# Altium PCB STM32F303VCT6_PLC.PcbDoc (part 3 of 3)
Units mm, origin at the board's own origin, x right, y up, seen from the top; angles counter-clockwise.
Board outline 150 x 150 mm, 4 copper layers ([L1] TOP, [L2] GND, [L3] POWER, [L4] BOTTOM), stack 1.58 mm thick; 269 components, 235 nets, 934 pads, 331 vias.
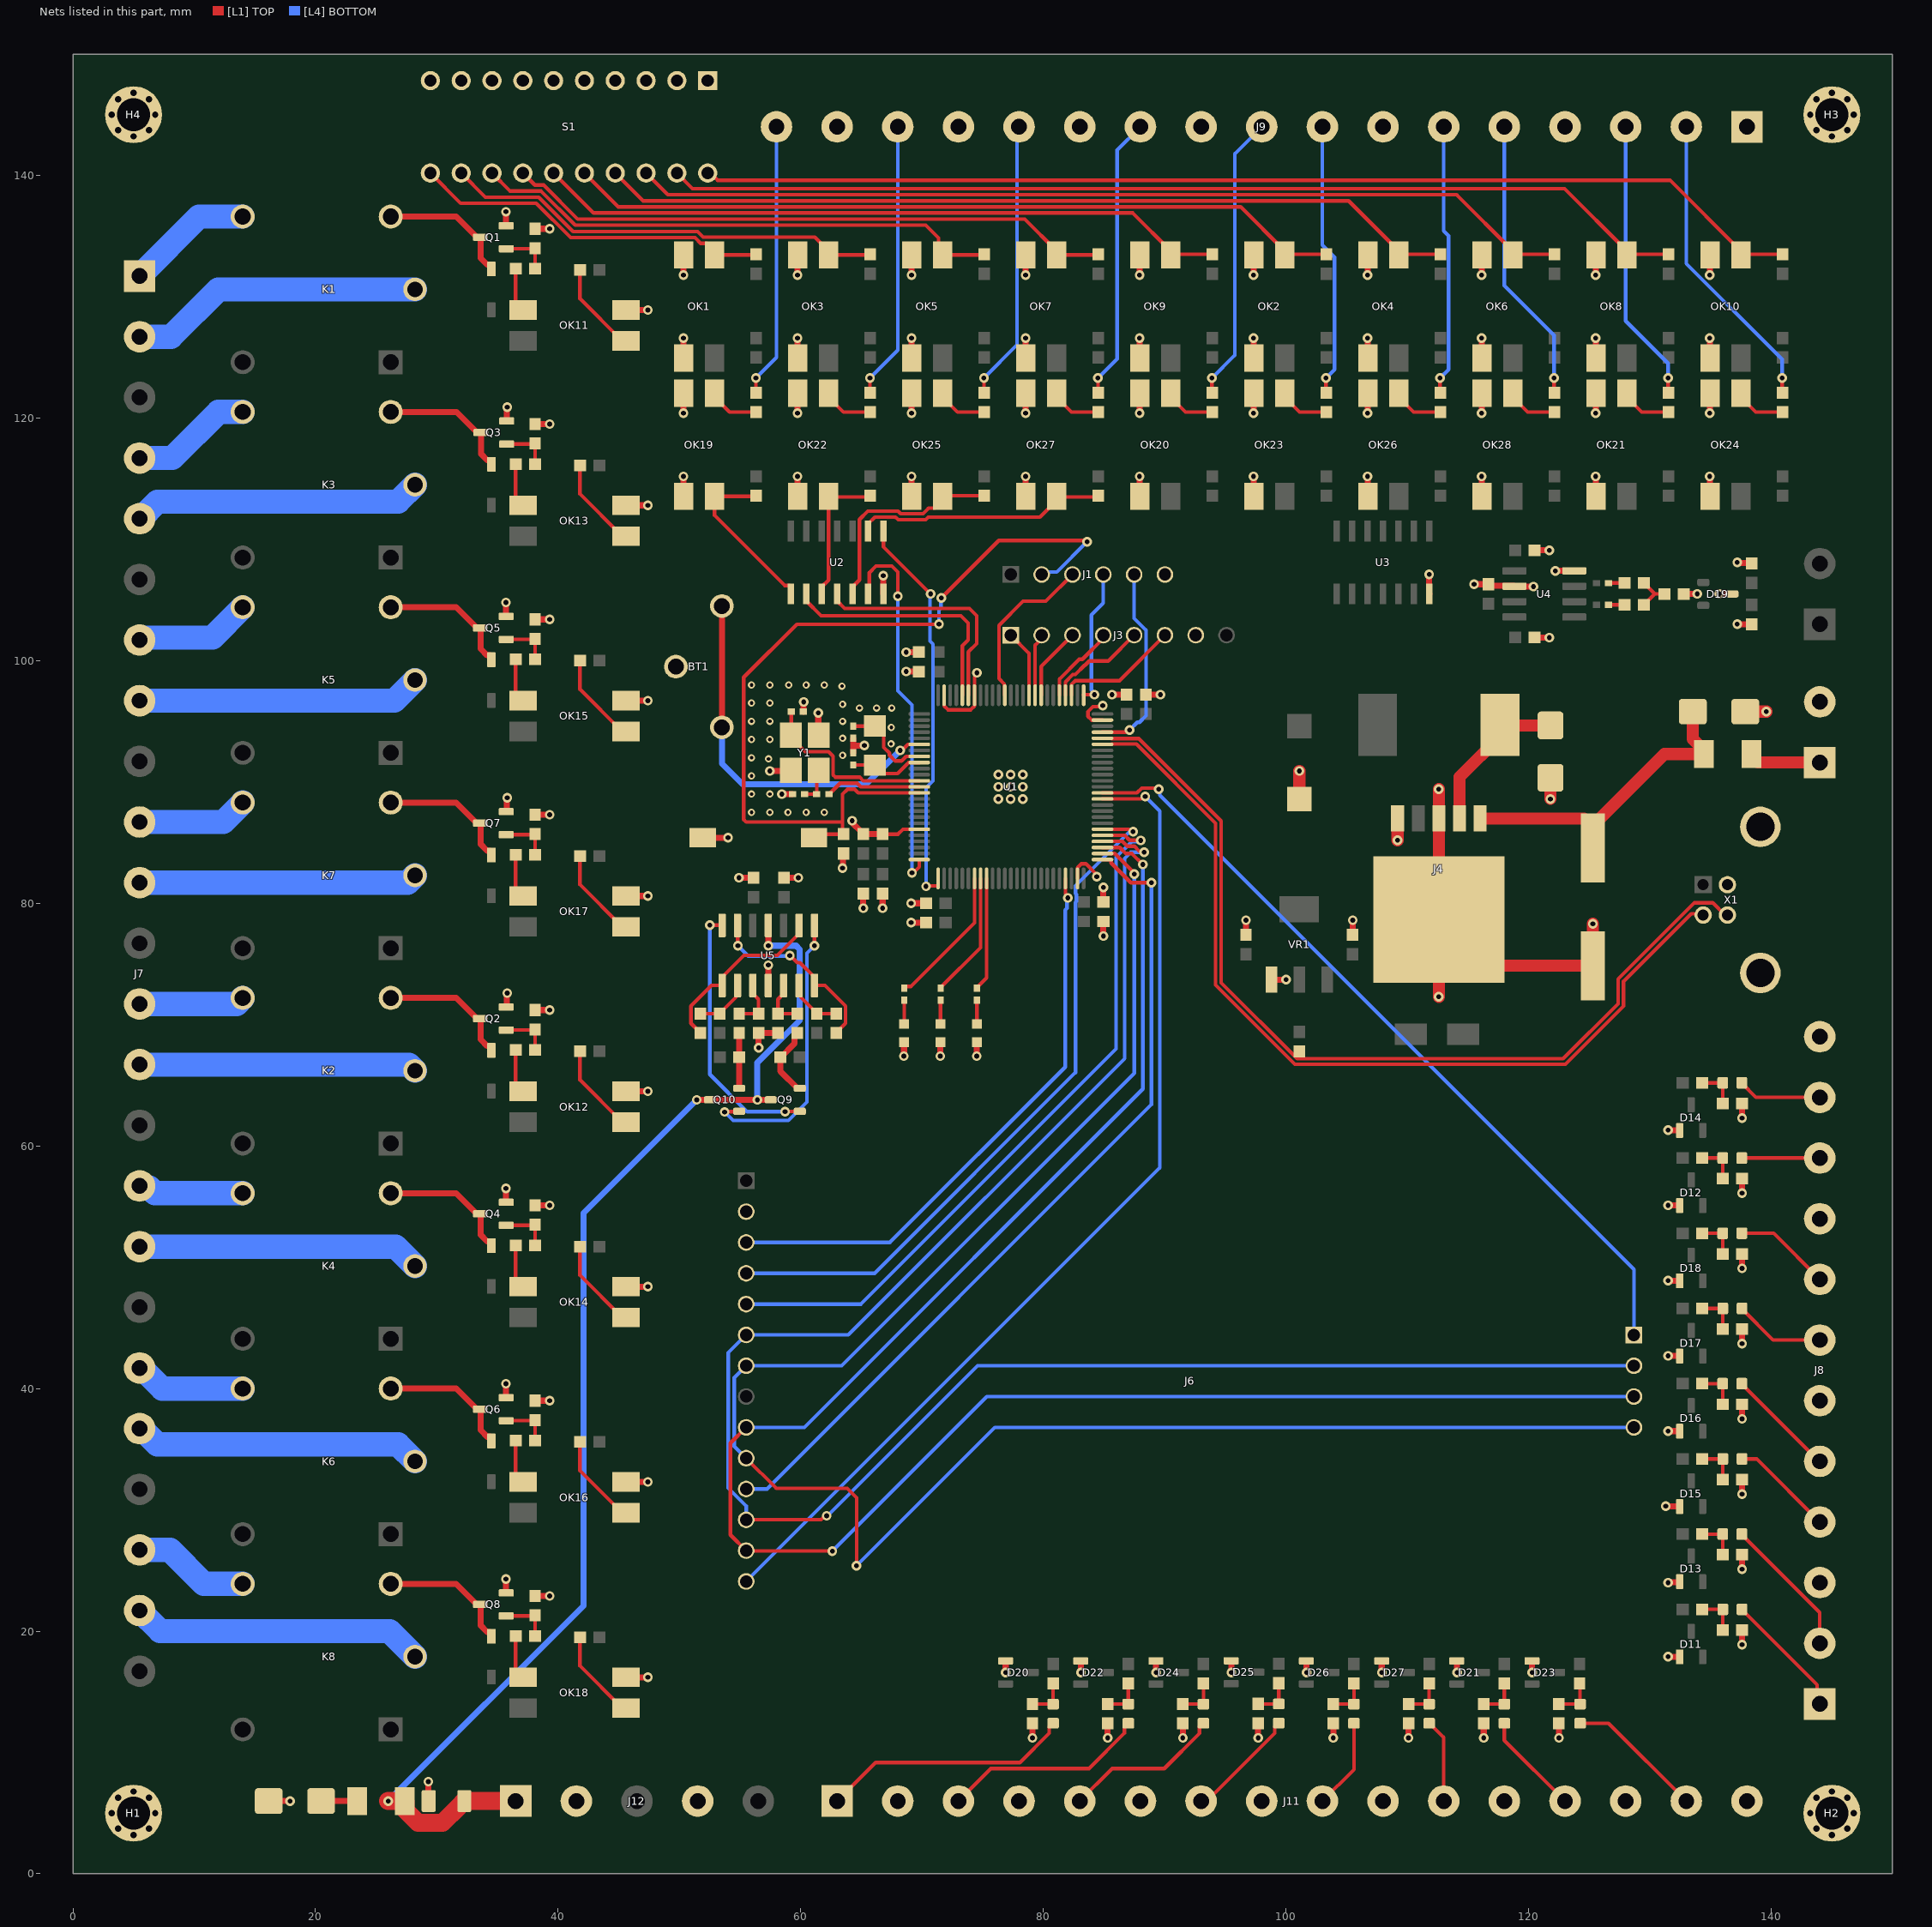
[diagram p5: the nets of this part, all layers, seen from the top]

## Via types
v1: diameter 0.8, hole 0.4, [L1] TOP to [L4] BOTTOM, 300 vias
v2: diameter 0.6, hole 0.3, [L1] TOP to [L4] BOTTOM, 31 vias

## Nets (pads, with @x,y where several pads share a name; then routed paths per layer and width w, separated by ;. In a path a pad name is that pad's centre, name@x,y a point inside that pad or via, vN(x,y) a via of type N, cw(c..) or ccw(c..) an arc to the next point about the centre after c; other vN are vias at no path point) (continued)
GND: BT1.N C1.2 C2.2 C3.2 C4.2 C5.2 C6.2 C7.2 C8.2 C9.2 C10.2 C11.2 C12.2 C13.2 C14.2 C15.2 C16.2 C17.2 C18.2 C19.2 C20.2 C21.2 C22.1 C23.1 C24.1 C25.1 C26.2 C27.2 C28.2 C29.2 C30.2 D1.A D2.A D11.1 D12.1 D13.1 D14.1 D15.1 D16.1 D17.1 D18.1 D19.3 D20.1 D21.1 D22.1 D23.1 D24.1 D25.1 D26.1 D27.1 D28.A DS1.2 DS2.2 DS3.2 H1.1 H2.1 H3.1 H4.1 J1.06 J3.07 J4.3 J4.5 J4.6 J5.2 J6.02 J8.3 J8.6 J8.9 J8.12 J9.1 J9.4 J9.7 J9.10 J9.12 J9.14 J9.16 J11.2 J11.4 J11.6 J11.8 J11.10 J11.12 J11.14 J11.16 J12.2 J12.4 OK1.2 OK1.3 OK2.2 OK2.3 OK3.2 OK3.3 OK4.2 OK4.3 OK5.2 OK5.3 OK6.2 OK6.3 OK7.2 OK7.3 OK8.2 OK8.3 OK9.2 OK9.3 OK10.2 OK10.3 OK11.2 OK12.2 OK13.2 OK14.2 OK15.2 OK16.2 OK17.2 OK18.2 OK19.2 OK19.3 OK20.2 OK20.3 OK21.2 OK21.3 OK22.2 OK22.3 OK23.2 OK23.3 OK24.2 OK24.3 OK25.2 OK25.3 OK26.2 OK26.3 OK27.2 OK27.3 OK28.2 OK28.3 Q1.2 Q2.2 Q3.2 Q4.2 Q5.2 Q6.2 Q7.2 Q8.2 R27.2 R28.2 R33.2 R34.2 R39.2 R40.2 R45.2 R46.2 R49.1 R50.1 R53.1 R54.1 R56.1 R58.1 R60.1 R62.1 R89.1 R90.1 R93.1 R94.1 R96.1 R98.1 R100.1 R102.1 R105.1 R110.1 S1.1A S1.2A S1.3A S1.4A S1.5A S1.6A S1.7A S1.8A S1.9A S1.10A SW1.1 U1.20 U1.49 U1.74 U1.94 U1.99 U2.7 U3.7 U4.2 U4.8 U5.11 VR1.1 X1.4 X1.P1 X1.P2 Y1.2 Y1.4 | length 252.5
  [L1] TOP w0.3: C15.2@66.746,85.7 68.023,85.7 68.423,86.1 U1.20@69.77,86.1 ; U1.99@71.82,97.15 71.82,96.264 72.134,95.95 74.006,95.95 74.32,96.264 74.32,98.665 74.52,98.865 v1(74.52,99) ; U1.49@82.82,82.05 82.82,82.936 83.134,83.25 83.506,83.25 84.304,82.452 84.304,82.296 v1(84.4,82.2) ; U1.74@84.87,95.1 83.984,95.1 83.67,95.414 83.67,95.786 84.088,96.204 84.804,96.204 v1(84.9,96.3)
  [L1] TOP w0.5: D28.A@16.14,6 v1(17.9,6) ; v1(29.3,7.6) 29.313,7.587 29.313,6.013 C28.2@29.325,6 ; v1(35.7,24.3) 35.71,24.29 35.71,23.16 Q8.2@35.72,23.15 ; v1(35.7,40.4) 35.71,40.39 35.71,39.26 Q6.2@35.72,39.25 ; v1(35.7,56.5) 35.71,56.49 35.71,55.36 Q4.2@35.72,55.35 ; v1(35.7,104.8) 35.71,104.79 35.71,103.66 Q5.2@35.72,103.65 ; v1(35.7,137) 35.71,136.99 35.71,135.86 Q1.2@35.72,135.85 ; Q2.2@35.72,71.45 35.76,71.49 35.76,72.56 v1(35.8,72.6) ; Q7.2@35.72,87.55 35.76,87.59 35.76,88.66 v1(35.8,88.7) ; Q3.2@35.76,119.75 35.78,119.77 35.78,120.88 v1(35.8,120.9) ; R46.2@38.1,22.9 v1(39.3,22.9) ; R40.2@38.1,39 v1(39.3,39) ; R34.2@38.1,55.1 v1(39.3,55.1) ; R28.2@38.1,71.2 v1(39.3,71.2) ; R45.2@38.1,87.3 v1(39.3,87.3) ; R39.2@38.1,103.4 v1(39.3,103.4) ; R33.2@38.1,119.5 v1(39.3,119.5) ; R27.2@38.1,135.6 v1(39.3,135.6) ; OK18.2@45.6,16.2 v1(47.4,16.2) ; OK16.2@45.6,32.3 v1(47.4,32.3) ; OK14.2@45.6,48.4 v1(47.4,48.4) ; OK12.2@45.6,64.5 v1(47.4,64.5) ; OK17.2@45.6,80.6 v1(47.4,80.6) ; OK15.2@45.6,96.7 v1(47.4,96.7) ; OK13.2@45.6,112.8 v1(47.4,112.8) ; OK11.2@45.6,128.9 v1(47.4,128.9) ; v1(50.33,115.19) 50.33,113.57 OK19.3@50.36,113.54 ; v1(50.33,120.39) 50.33,122.01 OK19.2@50.36,122.04 ; v1(50.33,126.59) 50.33,124.97 OK1.3@50.36,124.94 ; v1(50.33,131.79) 50.33,133.41 OK1.2@50.36,133.44 ; SW1.1@51.91,85.4 v1(54,85.4) ; v1(54.9,82.1) C29.2@56.124,82.1 ; v1(56.524,68.1) R110.1@56.524,69.3 R105.1@58.124,69.3 ; U5.11@57.324,73.225 v1(57.324,74.9) ; v1(57.446,90.9) 59.12,90.9 Y1.2@59.17,90.95 ; v1(58.446,89) C18.2@59.32,89 ; C30.2@58.624,82.1 v1(59.8,82.1) ; v1(59.73,115.19) 59.73,113.57 OK22.3@59.76,113.54 ; v1(59.73,120.39) 59.73,122.01 OK22.2@59.76,122.04 ; v1(59.73,126.59) 59.73,124.97 OK3.3@59.76,124.94 ; v1(59.73,131.79) 59.73,133.41 OK3.2@59.76,133.44 ; C11.2@60.22,95.8 60.233,95.8 60.233,96.587 v1(60.246,96.6) ; v1(61.446,95.7) 61.446,93.874 Y1.4@61.47,93.85 ; v1@63.483,82.937 63.483,84.063 C17.2@63.52,84.1 ; v1(64.238,86.808) 64.295,86.75 64.295,86.576 64.921,85.95 64.921,85.925 C16.2@65.146,85.7 C15.2@66.746,85.7 ; C19.2@64.32,92.4 64.32,93 ; C12.2@64.32,93.6 64.32,93 ; v1(65.146,79.6) C14.2@65.146,80.8 ; v1(65.246,93) 65.107,93 64.32,93 ; v1(66.746,79.6) C13.2@66.746,80.8 ; v1(66.8,107) 66.805,106.995 66.805,106.1 66.81,106.095 U2.7@66.81,105.499 ; v1(68.5,67.4) 68.512,67.412 68.512,68.538 DS1.2@68.524,68.55 ; v1(68.7,99.1) C7.2@69.746,99.1 ; v1(68.7,100.7) C8.2@69.746,100.7 ; v1(69.1,78.4) C4.2@70.346,78.4 ; v1(69.1,80) C3.2@70.346,80 ; v1(69.13,115.19) 69.13,113.57 OK25.3@69.16,113.54 ; v1(69.13,120.39) 69.13,122.01 OK25.2@69.16,122.04 ; v1(69.13,126.59) 69.13,124.97 OK5.3@69.16,124.94 ; v1(69.13,131.79) 69.13,133.41 OK5.2@69.16,133.44 ; v1(71.5,67.4) 71.512,67.412 71.512,68.538 DS2.2@71.524,68.55 ; v1(74.5,67.4) 74.512,67.412 74.512,68.538 DS3.2@74.524,68.55 ; D20.1@76.88,17.55 76.89,17.54 76.89,16.61 v1(76.9,16.6) ; v1(78.53,115.19) 78.53,113.57 OK27.3@78.56,113.54 ; v1(78.53,120.39) 78.53,122.01 OK27.2@78.56,122.04 ; v1(78.53,126.59) 78.53,124.97 OK7.3@78.56,124.94 ; v1(78.53,131.79) 78.53,133.41 OK7.2@78.56,133.44 ; v1(79.1,11.2) R89.1@79.1,12.4 ; D22.1@83.08,17.55 83.09,17.54 83.09,16.61 v1(83.1,16.6) ; v1(84.946,77.3) C6.2@84.946,78.5 ; C5.2@84.946,80.1 v1(84.946,81.3) ; v1(85.3,11.2) R93.1@85.3,12.4 ; v1(85.646,97.2) C1.2@86.846,97.2 ; v1(87.93,115.19) 87.93,113.57 OK20.3@87.96,113.54 ; v1(87.93,120.39) 87.93,122.01 OK20.2@87.96,122.04 ; v1(87.93,126.59) 87.93,124.97 OK9.3@87.96,124.94 ; v1(87.93,131.79) 87.93,133.41 OK9.2@87.96,133.44 ; C2.2@88.446,97.2 v1(89.646,97.2) ; D24.1@89.28,17.55 89.29,17.54 89.29,16.61 v1(89.3,16.6) ; v1(91.5,11.2) R96.1@91.5,12.4 ; D25.1@95.481,17.563 95.49,17.553 95.49,16.61 v1(95.5,16.6) ; C10.2@96.7,77.4 v1(96.7,78.6) ; v1(97.33,115.19) 97.33,113.57 OK23.3@97.36,113.54 ; v1(97.33,120.39) 97.33,122.01 OK23.2@97.36,122.04 ; v1(97.33,126.59) 97.33,124.97 OK2.3@97.36,124.94 ; v1(97.33,131.79) 97.33,133.41 OK2.2@97.36,133.44 ; v1(97.7,11.2) R98.1@97.701,12.413 ; VR1.1@98.8,73.7 v1(100,73.7) ; D26.1@101.68,17.55 101.69,17.54 101.69,16.61 v1(101.7,16.6) ; v1(103.9,11.2) R100.1@103.9,12.4 ; C9.2@105.5,77.4 v1(105.5,78.6) ; v1(106.73,115.19) 106.73,113.57 OK26.3@106.76,113.54 ; v1(106.73,120.39) 106.73,122.01 OK26.2@106.76,122.04 ; v1(106.73,126.59) 106.73,124.97 OK4.3@106.76,124.94 ; v1(106.73,131.79) 106.73,133.41 OK4.2@106.76,133.44 ; D27.1@107.88,17.55 107.89,17.54 107.89,16.61 v1(107.9,16.6) ; v1(110.1,11.2) R102.1@110.1,12.4 ; v1(111.8,107.1) 111.805,107.095 111.805,105.504 U3.7@111.81,105.499 ; D21.1@114.08,17.55 114.09,17.54 114.09,16.61 v1(114.1,16.6) ; v1(115.5,106.3) C23.1@116.7,106.3 116.815,106.185 118.78,106.185 118.848,106.118 120.383,106.118 v1(120.4,106.1) ; v1(116.13,115.19) 116.13,113.57 OK28.3@116.16,113.54 ; v1(116.13,120.39) 116.13,122.01 OK28.2@116.16,122.04 ; v1(116.13,126.59) 116.13,124.97 OK6.3@116.16,124.94 ; v1(116.13,131.79) 116.13,133.41 OK6.2@116.16,133.44 ; v1(116.3,11.2) R90.1@116.3,12.4 ; D23.1@120.28,17.55 120.29,17.54 120.29,16.61 v1(120.3,16.6) ; C26.2@120.5,101.9 v1(121.7,101.9) ; C24.1@120.5,109.1 v1(121.7,109.1) ; v1(122.2,107.4) 122.203,107.403 123.767,107.403 U4.8@123.77,107.405 ; v1(122.5,11.2) R94.1@122.5,12.4 ; v1(125.53,115.19) 125.53,113.57 OK21.3@125.56,113.54 ; v1(125.53,120.39) 125.53,122.01 OK21.2@125.56,122.04 ; v1(125.53,126.59) 125.53,124.97 OK8.3@125.56,124.94 ; v1(125.53,131.79) 125.53,133.41 OK8.2@125.56,133.44 ; v1(131.3,30.3) 131.31,30.29 132.44,30.29 D15.1@132.45,30.28 ; v1(131.5,17.9) 131.51,17.89 132.44,17.89 D11.1@132.45,17.88 ; v1(131.5,24) 131.54,24.04 132.41,24.04 D13.1@132.45,24.08 ; v1(131.5,36.5) 131.51,36.49 132.44,36.49 D16.1@132.45,36.48 ; v1(131.5,42.7) 131.51,42.69 132.44,42.69 D17.1@132.45,42.68 ; v1(131.5,48.9) 131.51,48.89 132.44,48.89 D18.1@132.45,48.88 ; v1(131.5,55.1) 131.51,55.09 132.44,55.09 D12.1@132.45,55.08 ; v1(131.5,61.3) 131.51,61.29 132.44,61.29 D14.1@132.45,61.28 ; C25.1@132.8,105.5 v1(133.9,105.5) ; v1(134.93,115.19) 134.93,113.57 OK24.3@134.96,113.54 ; v1(134.93,120.39) 134.93,122.01 OK24.2@134.96,122.04 ; v1(134.93,126.59) 134.93,124.97 OK10.3@134.96,124.94 ; v1(134.93,131.79) 134.93,133.41 OK10.2@134.96,133.44 ; v1(135.7,105.5) D19.3@136.8,105.5 ; v1(137.2,103) C27.2@138.4,103 ; v1(137.2,108.1) 137.25,108.05 138.35,108.05 C22.1@138.4,108 ; v1(137.6,18.9) R49.1@137.6,20.1 ; v1(137.6,25.1) R53.1@137.6,26.3 ; v1(137.6,31.3) R56.1@137.6,32.5 ; v1(137.6,37.5) R58.1@137.6,38.7 ; v1(137.6,43.7) R60.1@137.6,44.9 ; v1(137.6,49.9) R62.1@137.6,51.1 ; v1(137.6,56.1) R50.1@137.6,57.3 ; v1(137.6,62.3) R54.1@137.6,63.5
  [L1] TOP w1: C21.2@101.1,88.6 v1(101.1,90.9) ; J4.5@109.197,86.991 J4.5@109.197,86.991 109.199,85.202 v1(109.2,85.2) ; v1(112.6,72.3) J4.6@112.6,78.66 ; J4.3@112.601,86.991 112.601,78.66 116.411,74.85 C20.2@125.3,74.85 v1(125.3,78.3) ; J4.3@112.6,86.992 v1@112.6,89.4 ; v1(121.8,88.6) D2.A@121.8,90.34 ; D1.A@137.86,95.8 v1(139.6,95.8)
  other v1: 63.446,82.9 76.3,88.6 77.3,88.6 78.3,88.6 112.6,89.4 76.3,89.6 77.3,89.6 78.3,89.6 76.3,90.6 77.3,90.6 78.3,90.6
  other v2: 55.946,87.5 57.446,87.5 58.946,87.5 60.446,87.5 61.946,87.5 55.946,89 57.446,89 55.946,90.5 57.349,91.903 55.946,92 63.446,92.2 67.443,93.14 55.946,93.5 57.447,93.501 63.446,93.6 67.47,94.488 55.946,95 57.446,95 63.446,95 64.846,96.1 66.246,96.1 67.506,96.1 63.446,96.4 55.946,96.5 57.446,96.5 63.399,97.9 55.946,98 57.446,98 59,98 60.446,98 61.946,98
IC0: U1.96 U2.2 | length 20.8
  [L1] TOP w0.3: U2.2@60.46,105.499 60.46,104.915 61.675,103.7 73.2,103.7 73.8,103.1 73.8,101.7 73.32,101.22 U1.96@73.32,97.15
IC1: U1.95 U2.4 | length 19.4
  [L1] TOP w0.3: U2.4@63,105.499 63,104.915 63.615,104.3 73.9,104.3 74.5,103.7 74.5,101.4 73.82,100.72 U1.95@73.82,97.15
IC2: U1.25 U2.6 | length 31.2
  [L1] TOP w0.3: U2.6@65.54,105.499 65.657,105.616 65.657,107.257 66.2,107.8 67.5,107.8 68,107.3 v1(68,105.3) ; v1(69.17,82.522) 69.292,82.522 69.77,83 U1.25@69.77,83.6
  [L4] BOTTOM w0.3: v1(68,105.3) 68,99.9 68,97.51 69.17,96.34 v1(69.17,82.522)
IC3: U1.26 U2.8 | length 32.9
  [L1] TOP w0.3: U2.8@66.81,110.681 66.81,109.39 v1(70.7,105.5) ; v1(70.329,81.4) 70.354,81.425 71.32,81.425 U1.26@71.32,82.05
  [L4] BOTTOM w0.3: v1(70.329,81.4) 70.329,89.527 70.9,90.098 70.9,101.356 70.646,101.61 70.646,105.446 v1(70.7,105.5)
IC_0: OK19.4 R63.1 U2.1 | length 14.4
  [L1] TOP w0.3: OK19.4@52.93,113.57 OK19.4@52.9,113.54 ; R63.1@56.33,113.59 56.28,113.54 OK19.4@52.9,113.54 ; U2.1@59.19,105.499 59.19,106.083 59.073,106.2 58.665,106.2 52.9,111.965 OK19.4@52.9,113.54
IC_1: OK22.4 R69.1 U2.3 | length 11.7
  [L1] TOP w0.3: U2.3@61.73,105.499 61.73,106.083 62.3,106.653 OK22.4@62.3,113.54 62.35,113.49 65.63,113.49 R69.1@65.68,113.54
IC_2: OK25.4 R75.1 U2.5 | length 17.8
  [L1] TOP w0.3: U2.5@64.27,105.499 64.27,106.083 64.837,106.65 64.837,111.637 65.532,112.332 68.019,112.332 68.236,112.115 70.084,112.115 70.534,112.565 71.05,112.565 71.7,113.215 OK25.4@71.7,113.54 71.73,113.57 71.75,113.59 R75.1@75.13,113.59
IC_3: OK27.4 R79.1 U2.9 | length 20.9
  [L1] TOP w0.3: U2.9@65.54,110.681 65.54,111.265 66.107,111.832 67.812,111.832 68.029,111.615 70.291,111.615 70.508,111.832 79.717,111.832 81.1,113.215 OK27.4@81.1,113.54 81.15,113.49 84.43,113.49 R79.1@84.48,113.54
LCD_CS: J6.03 U1.47 | length 48
  [L1] TOP w0.3: U1.47@81.82,82.05 81.82,80.778 82.02,80.578 v1(82.02,80.443)
  [L4] BOTTOM w0.3: J6.03@55.5,52.04 67.34,52.04 81.8,66.5 81.8,79.3 81.8,79.443 81.95,79.593 81.95,80.373 v1(82.02,80.443)
LCD_D/C: J6.05 U1.55 | length 60.9
  [L1] TOP w0.3: U1.55@84.87,85.6 86.71,85.6 87.11,85.2 87.99,85.2 v1(88.014,85.175)
  [L4] BOTTOM w0.3: J6.05@55.5,46.96 64.96,46.96 86,68 86,79.3 86,83.8 87.28,85.08 87.919,85.08 v1(88.014,85.175)
LCD_MISO: J6.09 J6.13 J6.17 U1.53 | length 156.4
  [L1] TOP w0.3: J6.09@55.5,36.8 54.2,35.5 54.2,27.94 55.52,26.62 62.58,26.62 v1(62.6,26.6) ; U1.53@84.87,84.6 86.296,84.6 86.8,84.096 87.304,84.096 v1(88.2,83.2)
  [L4] BOTTOM w0.3: J6.09@55.5,36.8 60.3,36.8 88.2,64.7 v1(88.2,83.2) ; v1(62.6,26.6) 75.34,39.34 J6.17@128.68,39.34
LCD_MOSI: J6.06 J6.12 J6.16 U1.54 | length 157.7
  [L1] TOP w0.3: J6.12@55.5,29.18 55.51,29.19 61.677,29.19 61.998,29.512 v1(62.134,29.512) ; U1.54@84.87,85.1 86.503,85.1 86.903,84.7 87.5,84.7 87.904,84.296 88.204,84.296 v1(88.3,84.2)
  [L4] BOTTOM w0.3: J6.12@55.5,29.18 55.5,30.327 54.015,31.812 54.015,42.935 J6.06@55.5,44.42 63.92,44.42 86.7,67.2 86.7,83.7 87.2,84.2 v1(88.3,84.2) ; v1(62.134,29.512) 62.212,29.512 74.58,41.88 J6.16@128.68,41.88
LCD_RESET: J6.04 U1.56 | length 58.7
  [L1] TOP w0.3: U1.56@84.87,86.1 87.065,86.1 87.265,85.9 v1(87.4,85.9)
  [L4] BOTTOM w0.3: J6.04@55.5,49.5 66.1,49.5 82.646,66.046 82.646,79.3 82.646,80.079 82.72,80.153 82.72,80.733 82.646,80.807 82.646,81.436 87.014,85.804 87.304,85.804 v1(87.4,85.9)
LCD_SCK: J6.07 J6.10 J6.18 U1.52 | length 155.1
  [L1] TOP w0.3: J6.10@55.5,34.26 57.987,31.773 63.827,31.773 64.6,31 v1(64.6,25.4) ; U1.52@84.87,84.1 85.877,84.1 87.5,82.477 v1(87.5,82.4)
  [L4] BOTTOM w0.3: J6.10@55.5,34.26 54.515,35.245 54.515,40.895 J6.07@55.5,41.88 63.38,41.88 87.5,66 v1(87.5,82.4) ; v1(64.6,25.4) 76,36.8 J6.18@128.68,36.8
LED_CAN: R114.1 U1.33 | length 10.4
  [L1] TOP w0.3: R114.1@71.524,73 71.524,73.05 74.82,76.346 U1.33@74.82,82.05
LED_ERROR: R115.1 U1.34 | length 9.4
  [L1] TOP w0.3: R115.1@74.524,73 74.524,73.05 75.32,73.846 U1.34@75.32,82.05
LED_USB: R113.1 U1.32 | length 11.7
  [L1] TOP w0.3: R113.1@68.524,73 68.524,73.05 68.624,73.15 69.086,73.15 74.32,78.384 U1.32@74.32,82.05
NC0: J7.2 K1.COM | length 24.3
  [L4] BOTTOM w2: J7.2@5.5,126.7 8.1,126.7 12,130.6 K1.COM@28.2,130.6
NC1: J7.5 K3.COM | length 23.9
  [L4] BOTTOM w2: J7.5@5.5,111.7 5.572,111.7 6.972,113.1 26.8,113.1 K3.COM@28.2,114.5
NC2: J7.8 K5.COM | length 23.4
  [L4] BOTTOM w2: J7.8@5.5,96.7 26.5,96.7 K5.COM@28.2,98.4
NC3: J7.11 K7.COM | length 22.9
  [L4] BOTTOM w2: J7.11@5.5,81.7 27.6,81.7 K7.COM@28.2,82.3
NC4: J7.14 K2.COM | length 22.9
  [L4] BOTTOM w2: J7.14@5.5,66.7 27.7,66.7 K2.COM@28.2,66.2
NC5: J7.17 K4.COM | length 23.1
  [L4] BOTTOM w2: J7.17@5.777,51.7 26.6,51.7 K4.COM@28.2,50.1
NC6: J7.20 K6.COM | length 23.8
  [L4] BOTTOM w2: J7.20@5.5,36.7 5.662,36.7 6.962,35.4 26.8,35.4 K6.COM@28.2,34
NC7: J7.23 K8.COM | length 24.3
  [L4] BOTTOM w2: J7.23@5.5,21.7 7.2,20 26.1,20 K8.COM@28.2,17.9
NetBT1_P_1: BT1.P_1 BT1.P_2 U1.6 | length 31.3
  [L1] TOP w0.3: v1(68.198,92.603) 68.333,92.603 68.83,93.1 U1.6@69.77,93.1
  [L1] TOP w0.5: BT1.P_2@53.5,94.5 BT1.P_1@53.5,104.5
  [L4] BOTTOM w0.5: BT1.P_2@53.5,94.5 53.5,91.5 55.2,89.8 58.114,89.8 64.8,89.8 65.394,89.8 v1(68.198,92.603)
NetC18_1: C18.1 R2.1 Y1.3 | length 3
  [L1] TOP w0.3: C18.1@60.32,89 R2.1@61.32,89 61.32,90.8 Y1.3@61.47,90.95
NetC20_1: C20.1 D1.C F1.1 J4.1 | length 28.6
  [L1] TOP w1: J4.1@116.004,86.991 124.55,86.991 125.3,86.241 C20.1@125.3,84.55 125.3,86.4 131.2,92.3 F1.1@134.444,92.3 134.444,92.63 133.54,93.534 D1.C@133.54,95.8
NetC25_2: C25.2 R84.1 R85.2 | length 3.4
  [L1] TOP w0.3: R85.2@129.5,104.6 129.525,104.6 129.85,104.925 129.85,104.95 130.4,105.5 ; R84.1@129.5,106.4 129.525,106.4 129.85,106.075 129.85,106.05 130.4,105.5 ; C25.2@131.2,105.5 130.4,105.5
NetD2_C: D2.C J4.2 L1.1 | length 13.3
  [L1] TOP w1: J4.2@114.302,86.991 114.302,90.402 117.65,93.75 L1.1@117.65,94.7 117.69,94.66 D2.C@121.8,94.66
NetD3_A: D3.A K1.A2 Q1.3 | length 11.2
  [L1] TOP w0.5: K1.A2@26.2,136.6 31.585,136.6 33.285,134.9 Q1.3@33.6,134.9 33.6,133.18 34.145,132.635 34.385,132.635 34.5,132.52 D3.A@34.5,132.28
NetD4_A: D4.A K2.A2 Q2.3 | length 11.2
  [L1] TOP w0.5: K2.A2@26.2,72.2 31.585,72.2 33.285,70.5 Q2.3@33.6,70.5 33.6,68.78 34.145,68.235 34.385,68.235 34.5,68.12 D4.A@34.5,67.88
NetD5_A: D5.A K3.A2 Q3.3 | length 11.3
  [L1] TOP w0.5: K3.A2@26.2,120.5 31.625,120.5 33.325,118.8 Q3.3@33.64,118.8 33.64,117.04 34.145,116.535 34.385,116.535 34.5,116.42 D5.A@34.5,116.18
NetD6_A: D6.A K4.A2 Q4.3 | length 11.2
  [L1] TOP w0.5: K4.A2@26.2,56.1 31.585,56.1 33.285,54.4 Q4.3@33.6,54.4 33.6,52.68 34.145,52.135 34.385,52.135 34.5,52.02 D6.A@34.5,51.78
NetD7_A: D7.A K5.A2 Q5.3 | length 11.2
  [L1] TOP w0.5: K5.A2@26.2,104.4 31.585,104.4 33.285,102.7 Q5.3@33.6,102.7 33.6,100.98 34.145,100.435 34.385,100.435 34.5,100.32 D7.A@34.5,100.08
NetD8_A: D8.A K6.A2 Q6.3 | length 11.2
  [L1] TOP w0.5: K6.A2@26.2,40 31.585,40 33.285,38.3 Q6.3@33.6,38.3 33.6,36.58 34.145,36.035 34.385,36.035 34.5,35.92 D8.A@34.5,35.68
NetD9_A: D9.A K7.A2 Q7.3 | length 11.2
  [L1] TOP w0.5: K7.A2@26.2,88.3 31.585,88.3 33.285,86.6 Q7.3@33.6,86.6 33.6,84.88 34.145,84.335 34.385,84.335 34.5,84.22 D9.A@34.5,83.98
NetD10_A: D10.A K8.A2 Q8.3 | length 11.2
  [L1] TOP w0.5: K8.A2@26.2,23.9 31.585,23.9 33.285,22.2 Q8.3@33.6,22.2 33.6,20.48 34.145,19.935 34.385,19.935 34.5,19.82 D10.A@34.5,19.58
NetD28_C: D28.C F18.1 | length 3
  [L1] TOP w0.5: D28.C@20.46,6 F18.1@23.444,6
NetDS1_1: DS1.1 R113.2 | length 1.9
  [L1] TOP w0.3: DS1.1@68.524,70.05 R113.2@68.524,72
NetDS2_1: DS2.1 R114.2 | length 1.9
  [L1] TOP w0.3: DS2.1@71.524,70.05 R114.2@71.524,72
NetDS3_1: DS3.1 R115.2 | length 2
  [L1] TOP w0.3: DS3.1@74.524,70.05 R115.2@74.524,72
NetF1_2: F1.2 J5.1 | length 6
  [L1] TOP w1: F1.2@138.356,92.3 138.356,92.163 138.919,91.6 J5.1@144,91.6
NetF2_2: F2.2 R47.1 R49.2 | length 3.4
  [L1] TOP w0.3: R47.1@134.3,21.8 F2.2@136.013,21.8 136.013,20.112 R49.2@136,20.1
NetF3_2: F3.2 R48.1 R50.2 | length 3.4
  [L1] TOP w0.3: R48.1@134.3,59 F3.2@136,59 R50.2@136,57.3
NetF4_2: F4.2 R51.1 R53.2 | length 3.4
  [L1] TOP w0.3: R51.1@134.3,28 F4.2@136,28 R53.2@136,26.3
NetF5_2: F5.2 R52.1 R54.2 | length 3.4
  [L1] TOP w0.3: R52.1@134.3,65.2 F5.2@136,65.2 R54.2@136,63.5
NetF6_2: F6.2 R55.1 R56.2 | length 3.4
  [L1] TOP w0.3: R55.1@134.3,34.2 F6.2@136.012,34.2 136.012,32.512 R56.2@136,32.5
NetF7_2: F7.2 R57.1 R58.2 | length 3.4
  [L1] TOP w0.3: R57.1@134.3,40.4 F7.2@136,40.4 R58.2@136,38.7
NetF8_2: F8.2 R59.1 R60.2 | length 3.4
  [L1] TOP w0.3: R59.1@134.3,46.6 F8.2@136.012,46.6 136.012,44.912 R60.2@136,44.9
NetF9_2: F9.2 R61.1 R62.2 | length 3.4
  [L1] TOP w0.3: R61.1@134.3,52.8 F9.2@136,52.8 R62.2@136,51.1
NetF10_2: F10.2 R87.1 R89.2 | length 3.4
  [L1] TOP w0.3: R89.2@79.1,14 79.113,13.987 F10.2@80.799,13.987 80.799,15.699 R87.1@80.8,15.7
NetF11_2: F11.2 R88.1 R90.2 | length 3.4
  [L1] TOP w0.3: R90.2@116.3,14 116.313,13.987 F11.2@117.999,13.987 117.999,15.699 R88.1@118,15.7
NetF12_2: F12.2 R91.1 R93.2 | length 3.4
  [L1] TOP w0.3: R93.2@85.3,14 85.313,13.987 F12.2@86.999,13.987 R91.1@86.999,15.699
NetF13_2: F13.2 R92.1 R94.2 | length 3.5
  [L1] TOP w0.3: R94.2@122.5,14 122.512,13.988 F13.2@124.24,13.988 124.24,15.66 R92.1@124.2,15.7
NetF14_2: F14.2 R95.1 R96.2 | length 3.4
  [L1] TOP w0.3: R96.2@91.5,14 91.513,13.987 F14.2@93.199,13.987 R95.1@93.199,15.699
NetF15_2: F15.2 R97.1 R98.2 | length 3.4
  [L1] TOP w0.3: R98.2@97.701,14.013 97.714,14 F15.2@99.4,14 R97.1@99.4,15.712
NetF16_2: F16.2 R99.1 R100.2 | length 3.4
  [L1] TOP w0.3: R100.2@103.9,14 103.913,13.987 F16.2@105.599,13.987 R99.1@105.6,15.7
NetF17_2: F17.2 R101.1 R102.2 | length 3.4
  [L1] TOP w0.3: R102.2@110.1,14 110.113,13.987 F17.2@111.8,13.987 R101.1@111.8,15.7
NetOK11_1: OK11.1 R23.1 | length 7.6
  [L1] TOP w0.3: R23.1@41.8,132.2 41.8,129.835 45.275,126.36 OK11.1@45.6,126.36
NetOK11_3: OK11.3 R25.2 | length 3.6
  [L1] TOP w0.3: R25.2@36.5,132.3 36.5,129.5 OK11.3@37.1,128.9
NetOK12_1: OK12.1 R24.1 | length 7.6
  [L1] TOP w0.3: R24.1@41.8,67.8 41.8,65.435 45.275,61.96 OK12.1@45.6,61.96
NetOK12_3: OK12.3 R26.2 | length 3.6
  [L1] TOP w0.3: R26.2@36.5,67.9 36.5,65.1 OK12.3@37.1,64.5
NetOK13_1: OK13.1 R29.1 | length 7.6
  [L1] TOP w0.3: R29.1@41.8,116.1 41.8,113.735 45.275,110.26 OK13.1@45.6,110.26
NetOK13_3: OK13.3 R31.2 | length 3.6
  [L1] TOP w0.3: R31.2@36.5,116.2 36.5,113.4 OK13.3@37.1,112.8
NetOK14_1: OK14.1 R30.1 | length 7.6
  [L1] TOP w0.3: R30.1@41.8,51.7 41.8,49.335 45.275,45.86 OK14.1@45.6,45.86
NetOK14_3: OK14.3 R32.2 | length 3.6
  [L1] TOP w0.3: R32.2@36.5,51.8 36.5,49 OK14.3@37.1,48.4
NetOK15_1: OK15.1 R35.1 | length 7.6
  [L1] TOP w0.3: R35.1@41.8,100 41.8,97.635 45.275,94.16 OK15.1@45.6,94.16
NetOK15_3: OK15.3 R37.2 | length 3.6
  [L1] TOP w0.3: R37.2@36.5,100.1 36.5,97.3 OK15.3@37.1,96.7
NetOK16_1: OK16.1 R36.1 | length 7.6
  [L1] TOP w0.3: R36.1@41.8,35.6 41.8,33.235 45.275,29.76 OK16.1@45.6,29.76
NetOK16_3: OK16.3 R38.2 | length 3.6
  [L1] TOP w0.3: R38.2@36.5,35.7 36.5,32.9 OK16.3@37.1,32.3
NetOK17_1: OK17.1 R41.1 | length 7.6
  [L1] TOP w0.3: R41.1@41.8,83.9 41.8,81.535 45.275,78.06 OK17.1@45.6,78.06
NetOK17_3: OK17.3 R43.2 | length 3.6
  [L1] TOP w0.3: R43.2@36.5,84 36.5,81.2 OK17.3@37.1,80.6
NetOK18_1: OK18.1 R42.1 | length 7.6
  [L1] TOP w0.3: R42.1@41.8,19.5 41.8,17.135 45.275,13.66 OK18.1@45.6,13.66
NetOK18_3: OK18.3 R44.2 | length 3.6
  [L1] TOP w0.3: R44.2@36.5,19.6 36.5,16.8 OK18.3@37.1,16.2
NetOK19_1: OK19.1 R66.2 | length 4.3
  [L1] TOP w0.3: OK19.1@52.9,122.04 52.9,121.715 54.125,120.49 R66.2@56.33,120.49
NetOK20_1: OK20.1 R67.2 | length 4.3
  [L1] TOP w0.3: OK20.1@90.5,122.04 90.5,121.715 91.725,120.49 R67.2@93.93,120.49
NetOK21_1: OK21.1 R68.2 | length 4.3
  [L1] TOP w0.3: OK21.1@128.1,122.04 128.1,121.715 129.325,120.49 R68.2@131.53,120.49
NetOK22_1: OK22.1 R72.2 | length 4.3
  [L1] TOP w0.3: OK22.1@62.3,122.04 62.3,121.715 63.525,120.49 R72.2@65.73,120.49
NetOK23_1: OK23.1 R73.2 | length 4.3
  [L1] TOP w0.3: OK23.1@99.9,122.04 99.9,121.715 101.125,120.49 R73.2@103.33,120.49
NetOK24_1: OK24.1 R74.2 | length 4.3
  [L1] TOP w0.3: OK24.1@137.5,122.04 137.5,121.715 138.725,120.49 R74.2@140.93,120.49
NetOK25_1: OK25.1 R77.2 | length 4.3
  [L1] TOP w0.3: OK25.1@71.7,122.04 71.7,121.715 72.925,120.49 R77.2@75.13,120.49
NetOK26_1: OK26.1 R78.2 | length 4.3
  [L1] TOP w0.3: OK26.1@109.3,122.04 109.3,121.715 110.525,120.49 R78.2@112.73,120.49
NetOK27_1: OK27.1 R81.2 | length 4.3
  [L1] TOP w0.3: OK27.1@81.1,122.04 81.1,121.715 82.325,120.49 R81.2@84.53,120.49
NetOK28_1: OK28.1 R82.2 | length 4.3
  [L1] TOP w0.3: OK28.1@118.7,122.04 118.7,121.715 119.925,120.49 R82.2@122.13,120.49
NetQ1_1: Q1.1 R25.1 R27.1 | length 4.1
  [L1] TOP w0.3: Q1.1@35.72,133.95 38.05,133.95 R27.1@38.1,134 R25.1@38.1,132.3
NetQ2_1: Q2.1 R26.1 R28.1 | length 4.1
  [L1] TOP w0.3: Q2.1@35.72,69.55 38.05,69.55 R28.1@38.1,69.6 R26.1@38.1,67.9
NetQ3_1: Q3.1 R31.1 R33.1 | length 4.1
  [L1] TOP w0.3: Q3.1@35.76,117.85 38.05,117.85 R33.1@38.1,117.9 R31.1@38.1,116.2
NetQ4_1: Q4.1 R32.1 R34.1 | length 4
  [L1] TOP w0.3: Q4.1@35.72,53.45 R34.1@38.05,53.45 ; R32.1@38.1,51.8 R34.1@38.1,53.45
NetQ5_1: Q5.1 R37.1 R39.1 | length 4
  [L1] TOP w0.3: Q5.1@35.72,101.75 R39.1@38.05,101.75 ; R37.1@38.1,100.1 R39.1@38.1,101.75
NetQ6_1: Q6.1 R38.1 R40.1 | length 4
  [L1] TOP w0.3: Q6.1@35.72,37.35 R40.1@38.05,37.35 ; R38.1@38.1,35.7 R40.1@38.1,37.35
NetQ7_1: Q7.1 R43.1 R45.1 | length 4.1
  [L1] TOP w0.3: Q7.1@35.72,85.65 38.05,85.65 R45.1@38.1,85.7 R43.1@38.1,84
NetQ8_1: Q8.1 R44.1 R46.1 | length 4.1
  [L1] TOP w0.3: Q8.1@35.72,21.25 38.05,21.25 R46.1@38.1,21.3 R44.1@38.1,19.6
NetQ9_1: Q9.1 U5.7 | length 22
  [L1] TOP w0.3: v1(52.5,78.2) 53.489,78.2 U5.7@53.514,78.175 ; v1(58.706,62.817) 58.722,62.834 59.907,62.834 Q9.1@59.924,62.85
  [L4] BOTTOM w0.3: v1(52.5,78.2) 52.5,65.9 55.583,62.817 v1(58.706,62.817)
NetQ9_2: Q9.2 R103.2 R104.2 | length 5.9
  [L1] TOP w0.5: R104.2@58.324,67.3 58.324,66.15 59.724,64.75 Q9.2@59.924,64.75 ; R104.2@58.349,67.3 59.499,68.45 59.499,69.075 R103.2@59.724,69.3
NetQ10_1: Q10.1 U5.1 | length 23.7
  [L1] TOP w0.3: v1(53.724,62.8) 53.749,62.825 54.899,62.825 Q10.1@54.924,62.85 ; v1(61.124,76.5) 61.129,76.505 61.129,78.17 U5.1@61.134,78.175
  [L4] BOTTOM w0.3: v1(53.724,62.8) 54.424,62.1 58.979,62.1 60.5,63.621 60.5,75.876 v1(61.124,76.5)
NetQ10_2: Q10.2 R108.2 R109.2 | length 4.6
  [L1] TOP w0.5: Q10.2@54.924,64.75 R109.2@54.924,67.3 R108.2@54.924,69.3
NetR83_1: R83.1 R84.2 | length 1.3
  [L1] TOP w0.3: R83.1@126.6,106.4 R84.2@127.9,106.4
NetR85_1: R85.1 R86.2 | length 1.3
  [L1] TOP w0.3: R86.2@126.6,104.6 R85.1@127.9,104.6
NetR103_1: R103.1 R105.2 U5.12 | length 4.1
  [L1] TOP w0.3: U5.12@58.594,73.225 58.594,72.55 58.124,72.08 R105.2@58.124,70.9 R103.1@59.724,70.9
NetR106_1: R106.1 U5.6 U5.14 | length 15.6
  [L1] TOP w0.3: U5.6@54.784,78.175 54.804,78.155 54.804,76.52 v1(54.824,76.5) ; v1(59.1,75.7) 59.121,75.7 59.712,75.11 59.924,75.11 61.134,73.9 U5.14@61.134,73.225 61.998,73.225 63.699,71.524 63.699,70.1 62.924,69.325 R106.1@62.924,69.3
  [L4] BOTTOM w0.3: v1(54.824,76.5) 55.671,75.652 59.052,75.652 v1(59.1,75.7)
NetR106_2: R106.2 R107.1 U5.13 | length 4.5
  [L1] TOP w0.3: U5.13@59.864,73.225 60.014,73.075 60.014,72.235 61.324,70.925 R107.1@61.324,70.9 R106.2@62.924,70.9
NetR108_1: R108.1 R110.2 U5.10 | length 4.1
  [L1] TOP w0.3: R108.1@54.924,70.9 R110.2@56.524,70.9 56.524,72.08 56.054,72.55 U5.10@56.054,73.225
NetR111_1: R111.1 U5.2 U5.8 | length 15
  [L1] TOP w0.3: R111.1@51.724,69.3 51.724,69.325 50.949,70.1 50.949,71.524 52.649,73.225 U5.8@53.514,73.225 53.514,73.9 55.314,75.7 58.064,75.7 59.864,77.5 U5.2@59.864,78.175
NetR111_2: R111.2 R112.1 U5.9 | length 4.5
  [L1] TOP w0.3: R111.2@51.724,70.9 R112.1@53.324,70.9 ; R112.1@53.324,70.925 54.634,72.235 54.634,73.075 U5.9@54.784,73.225
NO0: J7.1 K1.NO | length 10.5
  [L4] BOTTOM w2: J7.1@5.5,131.7 10.4,136.6 K1.NO@14,136.6
NO1: J7.4 K3.NO | length 10.1
  [L4] BOTTOM w2: J7.4@5.5,116.7 8.2,116.7 12,120.5 K3.NO@14,120.5
NO2: J7.7 K5.NO | length 9.6
  [L4] BOTTOM w2: J7.7@5.5,101.7 5.615,101.815 6.039,101.815 6.124,101.9 11.5,101.9 K5.NO@14,104.4
NO3: J7.10 K7.NO | length 9.2
  [L4] BOTTOM w2: J7.10@5.5,86.7 12.4,86.7 K7.NO@14,88.3
NO4: J7.13 K2.NO | length 8.7
  [L4] BOTTOM w2: J7.13@5.5,71.7 13.5,71.7 K2.NO@14,72.2
NO5: J7.16 K4.NO | length 8.7
  [L4] BOTTOM w2: J7.16@5.5,56.7 5.615,56.585 6.277,56.585 6.762,56.1 K4.NO@14,56.1
NO6: J7.19 K6.NO | length 9.2
  [L4] BOTTOM w2: J7.19@5.5,41.7 5.662,41.7 7.362,40 K6.NO@14,40
NO7: J7.22 K8.NO | length 9.7
  [L4] BOTTOM w2: J7.22@5.5,26.7 8,26.7 10.8,23.9 K8.NO@14,23.9
NRST: C17.1 J1.02 SW1.2 U1.14 | length 71.3
  [L1] TOP w0.3: SW1.2@61.22,85.4 61.52,85.7 C17.1@63.52,85.7 63.446,85.774 63.446,86.7 ; U1.14@69.77,89.1 64.736,89.1 64.436,89.4 63.856,89.4 63.446,88.99 63.446,86.7 ; v1(71.399,103) 59.676,103 55.3,98.624 55.3,86.9 55.5,86.7 63.446,86.7 ; v1(71.59,105.166) 76.323,109.9 83.174,109.9 83.179,109.896 83.504,109.896 v1(83.6,109.8)
  [L4] BOTTOM w0.3: v1(71.399,103) 71.399,104.166 71.549,104.316 71.549,105.126 v1(71.59,105.166) ; J1.02@79.86,107.1 80.065,107.305 81.105,107.305 v1(83.6,109.8)
OSC32_IN: C12.1 U1.8 Y2.1 | length 7.5
  [L1] TOP w0.3: C12.1@64.32,94.6 66.095,94.6 Y2.1@66.12,94.625 66.843,93.902 66.843,92.851 67.32,92.374 67.32,92.199 67.791,91.728 68.304,91.728 68.626,92.05 68.634,92.05 68.684,92.1 U1.8@69.77,92.1
OSC32_OUT: C19.1 U1.9 Y2.2 | length 6.1
  [L1] TOP w0.3: C19.1@64.32,91.4 66.095,91.4 66.795,90.7 67.984,90.7 68.834,91.55 68.841,91.55 68.891,91.6 U1.9@69.77,91.6
OSC_IN: C11.1 U1.12 Y1.1 | length 15.1
  [L1] TOP w0.3: C11.1@59.22,95.8 59.22,93.9 Y1.1@59.17,93.85 59.17,93.7 60.37,92.5 62.294,92.5 62.67,92.124 62.67,90.576 62.846,90.4 64.346,90.4 64.85,90.4 65.15,90.1 U1.12@69.77,90.1
OSC_OUT: R2.2 U1.13 | length 8
  [L1] TOP w0.3: R2.2@62.32,89 62.37,89 62.47,89.1 62.47,89.124 63.246,89.9 64.346,89.9 64.643,89.9 64.943,89.6 U1.13@69.77,89.6
SD_CS: J6.15 U1.62 | length 66
  [L1] TOP w0.3: U1.62@84.87,89.1 87.71,89.1 88.11,89.5 89.265,89.5 89.365,89.4 v1(89.5,89.4)
  [L4] BOTTOM w0.3: v1(89.5,89.4) 89.596,89.304 89.596,88.904 128.68,49.82 J6.15@128.68,44.42
SPI_CS0: J3.03 U1.83 | length 6
  [L1] TOP w0.3: U1.83@79.82,97.15 79.82,99.52 J3.03@82.4,102.1
SPI_CS1: J3.02 U1.84 | length 5.2
  [L1] TOP w0.3: U1.84@79.32,97.15 79.32,101.27 79.86,101.81 J3.02@79.86,102.1
SPI_CS2: J3.01 U1.85 | length 5.6
  [L1] TOP w0.3: J3.01@77.32,102.1 78.82,100.6 U1.85@78.82,97.15
SPI_MISO: J3.05 U1.79 | length 8.4
  [L1] TOP w0.3: U1.79@81.82,97.15 81.82,98.243 82.427,98.85 82.634,98.85 83.399,99.615 83.429,99.615 83.78,99.966 85.346,99.966 J3.05@87.48,102.1
SPI_MOSI: J3.04 U1.80 | length 6.6
  [L1] TOP w0.3: U1.80@81.32,97.15 81.32,98.48 82.955,100.115 83.222,100.115 84.94,101.833 J3.04@84.94,102.1
SPI_SCK: J3.06 U1.78 | length 10.3
  [L1] TOP w0.3: U1.78@82.32,97.15 82.32,98.036 82.634,98.35 86.27,98.35 J3.06@90.02,102.1
SWCLK: J1.04 U1.76 | length 11.3
  [L1] TOP w0.3: U1.76@83.32,97.15 83.32,97.2 v1(84.2,97.2)
  [L4] BOTTOM w0.3: v1(84.2,97.2) 84.2,97.335 83.955,97.58 83.955,103.759 84.94,104.744 J1.04@84.94,107.1
SWDIO: J1.05 U1.72 | length 16.2
  [L1] TOP w0.3: U1.72@84.87,94.1 86.79,94.1 86.965,94.275 v1(87.1,94.275)
  [L4] BOTTOM w0.3: v1(87.1,94.275) 87.743,94.918 87.918,94.918 88.465,95.465 88.465,102.508 87.48,103.493 J1.05@87.48,107.1
SWO: J1.03 U1.89 | length 13.8
  [L1] TOP w0.3: U1.89@76.82,97.15 76.82,97.9 76.77,97.95 76.77,98.086 76.335,98.521 76.335,102.909 78.328,104.902 80.202,104.902 J1.03@82.4,107.1
T_CS: J6.11 U1.51 | length 69.8
  [L1] TOP w0.3: U1.51@84.87,83.6 85.589,83.6 85.589,83.321 87.21,81.7 v1(88.9,81.7)
  [L4] BOTTOM w0.3: J6.11@55.5,31.72 57.22,31.72 88.9,63.4 v1(88.9,81.7)
T_IRQ: J6.14 U1.61 | length 82.9
  [L1] TOP w0.3: U1.61@84.87,88.6 88.065,88.6 88.265,88.8 v1(88.4,88.8)
  [L4] BOTTOM w0.3: J6.14@55.5,24.1 89.6,58.2 89.6,87.6 v1(88.4,88.8)
TERMINAL_ADC0: F10.1 J11.1 | length 20.8
  [L1] TOP w0.3: J11.1@63,6 66.175,9.175 78.065,9.175 80.474,11.584 80.474,12.124 80.762,12.412 F10.1@80.799,12.412
TERMINAL_ADC1: F12.1 J11.3 | length 17
  [L1] TOP w0.3: J11.3@73,6 75.675,8.675 83.765,8.675 86.674,11.584 86.674,12.124 86.962,12.412 F12.1@86.999,12.412
TERMINAL_ADC2: F14.1 J11.5 | length 13.2
  [L1] TOP w0.3: J11.5@83,6 85.675,8.675 89.965,8.675 92.874,11.584 92.874,12.124 93.162,12.412 F14.1@93.199,12.412
TERMINAL_ADC3: F15.1 J11.7 | length 9.4
  [L1] TOP w0.3: J11.7@93,6 93.49,6 99.075,11.585 99.075,12.138 99.363,12.425 F15.1@99.4,12.425
TERMINAL_ADC4: F16.1 J11.9 | length 7.5
  [L1] TOP w0.3: J11.9@103,6 105.599,8.599 F16.1@105.599,12.412
TERMINAL_ADC5: F17.1 J11.11 | length 6.9
  [L1] TOP w0.3: F17.1@111.8,12.412 111.837,12.412 113,11.249 J11.11@113,6
TERMINAL_ADC6: F11.1 J11.13 | length 8.5
  [L1] TOP w0.3: F11.1@117.999,12.412 117.999,11.001 J11.13@123,6
TERMINAL_ADC7: F13.1 J11.15 | length 11.4
  [L1] TOP w0.3: F13.1@124.24,12.413 126.587,12.413 J11.15@133,6
TERMINAL_DADC0N: F4.1 J8.2 | length 11.7
  [L1] TOP w0.3: F4.1@137.575,28 137.575,27.962 144,21.537 J8.2@144,19
TERMINAL_DADC0P: F2.1 J8.1 | length 10.5
  [L1] TOP w0.3: F2.1@137.587,21.8 137.587,21.762 143.776,15.574 143.776,14.224 J8.1@144,14
TERMINAL_DADC1N: F7.1 J8.5 | length 9.1
  [L1] TOP w0.3: F7.1@137.575,40.4 137.575,40.362 143.937,34 J8.5@144,34
TERMINAL_DADC1P: F6.1 J8.4 | length 8.6
  [L1] TOP w0.3: F6.1@137.587,34.2 138.8,34.2 J8.4@144,29
TERMINAL_DADC2N: F9.1 J8.8 | length 8
  [L1] TOP w0.3: F9.1@137.575,52.8 140.2,52.8 J8.8@144,49
TERMINAL_DADC2P: F8.1 J8.7 | length 7.5
  [L1] TOP w0.3: F8.1@137.587,46.6 137.587,46.562 140.15,44 J8.7@144,44
TERMINAL_DADC3N: F5.1 J8.11 | length 6.9
  [L1] TOP w0.3: F5.1@137.575,65.2 137.575,65.162 138.737,64 J8.11@144,64
TERMINAL_DADC3P: F3.1 J8.10 | length 6.4
  [L1] TOP w0.3: F3.1@137.575,59 J8.10@144,59
TERMINAL_DI0: OK1.1 R3.1 S1.10B | length 29.9
  [L1] TOP w0.3: S1.10B@29.47,140.19 31.96,137.7 38.19,137.7 41.025,134.865 51.284,134.865 51.749,134.4 52.25,134.4 52.9,133.75 OK1.1@52.9,133.44 56.28,133.44 R3.1@56.33,133.49
TERMINAL_DI1: OK3.1 R7.1 S1.9B | length 36.7
  [L1] TOP w0.3: S1.9B@32.01,140.19 34,138.2 38.397,138.2 41.232,135.365 51.491,135.365 51.956,134.9 61.165,134.9 62.3,133.765 OK3.1@62.3,133.44 65.68,133.44 R7.1@65.73,133.49
TERMINAL_DI2: OK5.1 R11.1 S1.8B | length 44
  [L1] TOP w0.3: S1.8B@34.55,140.19 36.04,138.7 38.604,138.7 41.404,135.9 70.3,135.9 71.361,134.839 71.361,133.779 OK5.1@71.7,133.44 75.08,133.44 R11.1@75.13,133.49
TERMINAL_DI3: OK7.1 R15.1 S1.7B | length 50.4
  [L1] TOP w0.3: S1.7B@37.09,140.19 38.08,139.2 38.811,139.2 41.611,136.4 78.465,136.4 81.1,133.765 OK7.1@81.1,133.44 84.48,133.44 R15.1@84.53,133.49
TERMINAL_DI4: OK9.1 R19.1 S1.6B | length 57.3
  [L1] TOP w0.3: S1.6B@39.63,140.19 42.92,136.9 87.365,136.9 90.5,133.765 OK9.1@90.5,133.44 90.55,133.49 R19.1@93.93,133.49
TERMINAL_DI5: OK2.1 R5.1 S1.5B | length 64.2
  [L1] TOP w0.3: S1.5B@42.17,140.19 44.96,137.4 96.265,137.4 99.9,133.765 OK2.1@99.9,133.44 99.95,133.49 R5.1@103.33,133.49
TERMINAL_DI6: OK4.1 R9.1 S1.4B | length 71
  [L1] TOP w0.3: S1.4B@44.71,140.19 47,137.9 105.165,137.9 109.3,133.765 OK4.1@109.3,133.44 109.35,133.49 R9.1@112.73,133.49
TERMINAL_DI7: OK6.1 R13.1 S1.3B | length 77.9
  [L1] TOP w0.3: S1.3B@47.25,140.19 49.04,138.4 114.065,138.4 118.7,133.765 OK6.1@118.7,133.44 118.75,133.49 R13.1@122.13,133.49
TERMINAL_DI8: OK8.1 R17.1 S1.2B | length 84.7
  [L1] TOP w0.3: S1.2B@49.79,140.19 51.08,138.9 122.965,138.9 128.1,133.765 OK8.1@128.1,133.44 128.15,133.49 R17.1@131.53,133.49
TERMINAL_DI9: OK10.1 R21.1 S1.1B | length 91.6
  [L1] TOP w0.3: S1.1B@52.33,140.19 52.556,140.19 53.146,139.6 131.665,139.6 137.5,133.765 OK10.1@137.5,133.44 137.55,133.49 R21.1@140.93,133.49
TERMINAL_E0+: J9.9 R67.1 | length 23.6
  [L1] TOP w0.3: v1(93.9,123.3) 93.9,122.12 R67.1@93.93,122.09
  [L4] BOTTOM w0.3: v1(93.9,123.3) 95.778,125.178 95.778,141.778 J9.9@98,144
TERMINAL_E0-: J9.8 R73.1 | length 22.6
  [L1] TOP w0.3: v1(103.3,123.3) 103.3,122.12 R73.1@103.33,122.09
  [L4] BOTTOM w0.3: J9.8@103,144 103,134.256 104,133.256 104,124 v1(103.3,123.3)
TERMINAL_E1+: J9.6 R78.1 | length 22.4
  [L1] TOP w0.3: v1(112.7,123.3) 112.7,122.12 R78.1@112.73,122.09
  [L4] BOTTOM w0.3: v1(112.7,123.3) 113.4,124 113.4,135.024 113,135.424 J9.6@113,144
TERMINAL_E1-: J9.5 R82.1 | length 23.6
  [L1] TOP w0.3: v1(122.1,123.3) 122.1,122.12 R82.1@122.13,122.09
  [L4] BOTTOM w0.3: J9.5@118,144 118,130.91 122.1,126.81 v1(122.1,123.3)
TERMINAL_E2+: J9.3 R68.1 | length 23.4
  [L1] TOP w0.3: v1(131.5,123.3) 131.5,122.12 R68.1@131.53,122.09
  [L4] BOTTOM w0.3: J9.3@128,144 128,128 131.5,124.5 v1(131.5,123.3)
TERMINAL_E2-: J9.2 R74.1 | length 25.2
  [L1] TOP w0.3: v1(140.9,123.3) 140.9,122.12 R74.1@140.93,122.09
  [L4] BOTTOM w0.3: J9.2@133,144 133,132.73 140.9,124.83 v1(140.9,123.3)
TERMINAL_IC0: J9.17 R66.1 | length 22.6
  [L1] TOP w0.3: v1(56.3,123.3) 56.3,122.12 R66.1@56.33,122.09
  [L4] BOTTOM w0.3: v1(56.3,123.3) 58,125 J9.17@58,144
TERMINAL_IC1: J9.15 R72.1 | length 22.9
  [L1] TOP w0.3: v1(65.7,123.3) 65.7,122.12 R72.1@65.73,122.09
  [L4] BOTTOM w0.3: v1(65.7,123.3) 68,125.6 J9.15@68,144
TERMINAL_IC2: J9.13 R77.1 | length 23.1
  [L1] TOP w0.3: v1(75.1,123.3) 75.1,122.12 R77.1@75.13,122.09
  [L4] BOTTOM w0.3: v1(75.1,123.3) 77.83,126.03 77.83,143.83 J9.13@78,144
TERMINAL_IC3: J9.11 R81.1 | length 23.4
  [L1] TOP w0.3: v1(84.5,123.3) 84.5,122.12 R81.1@84.53,122.09
  [L4] BOTTOM w0.3: v1(84.5,123.3) 86.078,124.878 86.078,142.078 J9.11@88,144
USB_N: U1.70 X1.2 | length 74.6
  [L1] TOP w0.3: U1.70@84.87,93.1 85.62,93.1 85.645,93.125 87.675,93.125 94.2,86.6 94.2,73.265 100.734,66.731 123.03,66.731 127.83,71.532 127.83,73.566 133.402,79.138 134.282,79.138 X1.2@134.39,79.03
USB_P: R1.2 U1.71 X1.3 | length 77.2
  [L1] TOP w0.3: U1.71@84.87,93.6 85.62,93.6 85.645,93.575 87.861,93.575 94.65,86.786 94.65,73.451 100.92,67.181 122.843,67.181 127.38,71.718 127.38,73.752 133.672,80.044 135.176,80.044 136.19,79.03 X1.3@136.39,79.03
VDC: C28.1 F18.2 J12.1 Q9.3 Q10.3 U5.4 | length 105.1
  [L1] TOP w0.5: v1(51.424,63.8) Q10.3@52.524,63.8 v1(56.424,63.8) Q9.3@57.524,63.8 ; v1(57.324,76.5) U5.4@57.324,78.175
  [L1] TOP w1.5: v1(26,6) F18.2@27.356,6 27.419,5.937 27.419,5.233 28.451,4.2 30.475,4.2 31.768,5.493 31.768,5.518 32.25,6 C28.1@32.275,6 J12.1@36.5,6
  [L4] BOTTOM w0.5: v1(26,6) 42.1,22.1 42.1,54.476 v1(51.424,63.8) ; v1(56.424,63.8) 56.424,66.869 59.9,70.345 59.9,76.207 59.607,76.5 v1(57.324,76.5)
pads on no net: D11.2 D12.2 D13.2 D14.2 D15.2 D16.2 D17.2 D18.2 D20.2 D21.2 D22.2 D23.2 D24.2 D25.2 D26.2 D27.2 U1.7 U1.10 U1.11 U1.31 U1.48 U1.67 U1.68 U1.69 U1.73 U1.77 U1.90 U1.91 U2.10 U2.11 U2.12 U2.13 U4.5

## Polygon pours and split planes (outlines as drawn)
+3.3V on [L3] POWER "+3.3V_L03_P001" (solid, pour order 1): 97.5,101.6 142.3,101.6 142.3,129.6 45,129.6 45,0 150,0 150,71.8 97.5,71.8
+5V on [L3] POWER "+5V_L03_P000" (solid, pour order 0): 150,72.3 150,150 0,150 0,10 0,0 11,0 45,0 45,129.6 142.3,129.6 142.3,101.1 97.5,101.1 97.5,72.3
GND on [L2] GND "GND_L02_P003" (solid, remove dead copper, pour order 4): 0,0 0,150 150,150 150,0
GND on [L1] TOP "gnd_TOP_P002" (solid, remove dead copper, pour order 3): 0,0 0,150 150,150 150,0
GND on [L4] BOTTOM "GND_BOTTOM_P004" (solid, remove dead copper, pour order 5): 0,0 0,150 150,150 150,0

## Keep-outs
Keep-Out Layer:
  the board outline again, w0.2

## Silkscreen, mask and mechanical layers (free items; w line width, h text height)
Top Overlay:
  lines w0.2: 59.6,96.4 59.6,98.8 ; 63.6,76 67.4,76 ; 125.3,108.4 125.3,112.1 ; 128.9,108.4 128.9,110.8 ; 132.5,108.4 132.5,110.8 ; 80.1,11.703 81.5,11.703 81.5,14.703 80.1,14.703 80.1,11.703 ; 86.3,11.703 87.7,11.703 87.7,14.703 86.3,14.703 86.3,11.703 ; 92.5,11.703 93.9,11.703 93.9,14.703 92.5,14.703 92.5,11.703 ; 98.7,11.703 100.1,11.703 100.1,14.703 98.7,14.703 98.7,11.703 ; 104.9,11.703 106.3,11.703 106.3,14.703 104.9,14.703 104.9,11.703 ; 111.1,11.703 112.5,11.703 112.5,14.703 111.1,14.703 111.1,11.703 ; 117.3,11.703 118.7,11.703 118.7,14.703 117.3,14.703 117.3,11.703 ; 123.5,11.7 123.5,14.7 125,14.7 125,11.7 123.5,11.7 ; 135.3,21.1 138.3,21.1 138.3,22.5 135.3,22.5 135.3,21.1 ; 135.3,27.3 138.3,27.3 138.3,28.7 135.3,28.7 135.3,27.3 ; 135.3,33.5 138.3,33.5 138.3,34.9 135.3,34.9 135.3,33.5 ; 135.3,39.7 138.3,39.7 138.3,41.1 135.3,41.1 135.3,39.7 ; 135.3,45.9 138.3,45.9 138.3,47.3 135.3,47.3 135.3,45.9 ; 135.3,52.1 138.3,52.1 138.3,53.5 135.3,53.5 135.3,52.1 ; 135.3,58.3 138.3,58.3 138.3,59.7 135.3,59.7 135.3,58.3 ; 135.3,64.5 135.3,65.9 138.3,65.9 138.3,64.5 135.3,64.5
  lines w0.254: 73.1,25.513 122.6,25.513 ; 78.576,19.4 78.576,31.3 ; 84.776,19.4 84.776,31.3 ; 90.976,19.4 90.976,31.3 ; 97.176,19.4 97.176,31.3 ; 103.3,19.4 103.3,31.3 ; 109.5,19.4 109.5,31.3 ; 115.7,19.4 115.7,31.3 ; 123.9,28.5 130.5,28.5 ; 123.9,32 130.4,32 ; 123.9,52.4 130.5,52.4 ; 123.9,55.9 130.5,55.9 ; 123.9,59.4 130.5,59.4 ; 123.9,62.9 130.4,62.9 ; 127.2,25.4 127.2,35 ; 127.2,49.4 127.2,65.9 ; 137,89.7 139,89.7 ; 138,88.7 138,90.7 ; 138,98 138,100 ; 50.55,83.4 50.55,87.4 62.5,87.4 62.5,83.4 50.55,83.4 ; 52.7,72 52.7,79.4 61.9,79.4 61.9,72 52.7,72 ; 58,89.6 58,95.2 62.7,95.2 62.7,89.6 58,89.6 ; 64.9,90.2 64.9,95.8 67.3,95.8 67.3,90.2 64.9,90.2
  text "IC0" at 55.847,145.796 h1
  text "GND" at 60.847,145.796 h1
  text "IC1" at 65.847,145.796 h1
  text "GND" at 70.847,145.796 h1
  text "IC2" at 75.847,145.796 h1
  text "GND" at 80.847,145.796 h1
  text "IC3" at 85.747,145.796 h1
  text "GND" at 90.747,145.796 h1
  text "E0+" at 95.747,145.796 h1
  text "E0-" at 100.747,145.796 h1
  text "GND" at 105.747,145.796 h1
  text "E1+" at 110.847,145.796 h1
  text "E1-" at 115.747,145.796 h1
  text "GND" at 120.747,145.796 h1
  text "E2+" at 125.847,145.796 h1
  text "E2-" at 130.747,145.796 h1
  text "GND" at 135.747,145.796 h1
  text "NO0" at -0.053,131.496 h1
  text "NC0" at -0.053,126.496 h1
  text "COM0" at -0.053,121.496 h1
  text "NO1" at -0.053,116.496 h1
  text "NC1" at -0.053,111.496 h1
  text "CAN_N/P" at 146.435,111.422 h1.52 r90
  text "3.3V RST SWO CLK DIO GND" at 76.642,108.9 h0.6
  text "STLINK2" at 68.091,106.6 h1
  text "COM1" at -0.053,106.496 h1
  text "NO2" at -0.053,101.496 h1
  text "CS2 CS1 CS0 MOSI MISO CLK GND 3.3V" at 76.343,99.7 h0.6
  text "NC2" at -0.053,96.496 h1
  text "COM2" at -0.004,91.796 h1
  text "NO3" at -0.004,86.496 h1
  text "NC3" at -0.053,81.496 h1
  text "COM3" at -0.053,76.596 h1
  text "NO4" at -0.053,71.496 h1
  text "GND" at 144.847,67.996 h1
  text "NC4" at -0.053,66.496 h1
  text "USB" at 69.023,64.067 h1 r90
  text "CAN" at 72.023,64.067 h1 r90
  text "3N" at 144.847,62.996 h1
  text "ERROR" at 75.023,62.067 h1 r90
  text "COM4" at -0.053,61.496 h1
  text "3P" at 144.847,57.996 h1
  text "NO5" at -0.053,56.496 h1
  text "GND" at 144.847,52.996 h1
  text "NC5" at -0.053,51.496 h1
  text "2N" at 144.847,47.996 h1
  text "COM5" at -0.053,46.496 h1
  text "2P" at 144.847,42.996 h1
  text "NO6" at -0.053,41.496 h1
  text "GND" at 144.847,37.996 h1
  text "NC6" at -0.053,36.496 h1
  text "1N" at 144.847,32.996 h1
  text "COM6" at -0.004,31.596 h1
  text "1P" at 144.896,27.996 h1
  text "NO7" at -0.004,26.496 h1
  text "GND" at 144.896,22.996 h1
  text "NC7" at -0.053,21.496 h1
  text "0N" at 144.847,17.996 h1
  text "COM7" at -0.053,16.496 h1
  text "0P" at 144.847,12.996 h1
  text "VDC" at 34.247,2.296 h1
  text "GND" at 39.247,2.296 h1
  text "AO0" at 44.247,2.296 h1
  text "GND" at 49.247,2.296 h1
  text "AO1" at 54.247,2.296 h1
  text "ADC0" at 60.747,2.296 h1
  text "GND" at 65.747,2.296 h1
  text "ADC1" at 70.747,2.296 h1
  text "GND" at 75.747,2.296 h1
  text "ADC2" at 80.747,2.296 h1
  text "GND" at 85.647,2.296 h1
  text "ADC3" at 90.647,2.296 h1
  text "GND" at 95.647,2.296 h1
  text "ADC4" at 100.647,2.296 h1
  text "GND" at 105.647,2.296 h1
  text "ADC5" at 110.747,2.296 h1
  text "GND" at 115.647,2.296 h1
  text "ADC6" at 120.647,2.296 h1
  text "GND" at 125.647,2.296 h1
  text "ADC7" at 130.647,2.296 h1
  text "GND" at 135.647,2.296 h1